# EAGLE board PCB-AC2SLb (EAGLE 6.5.0)
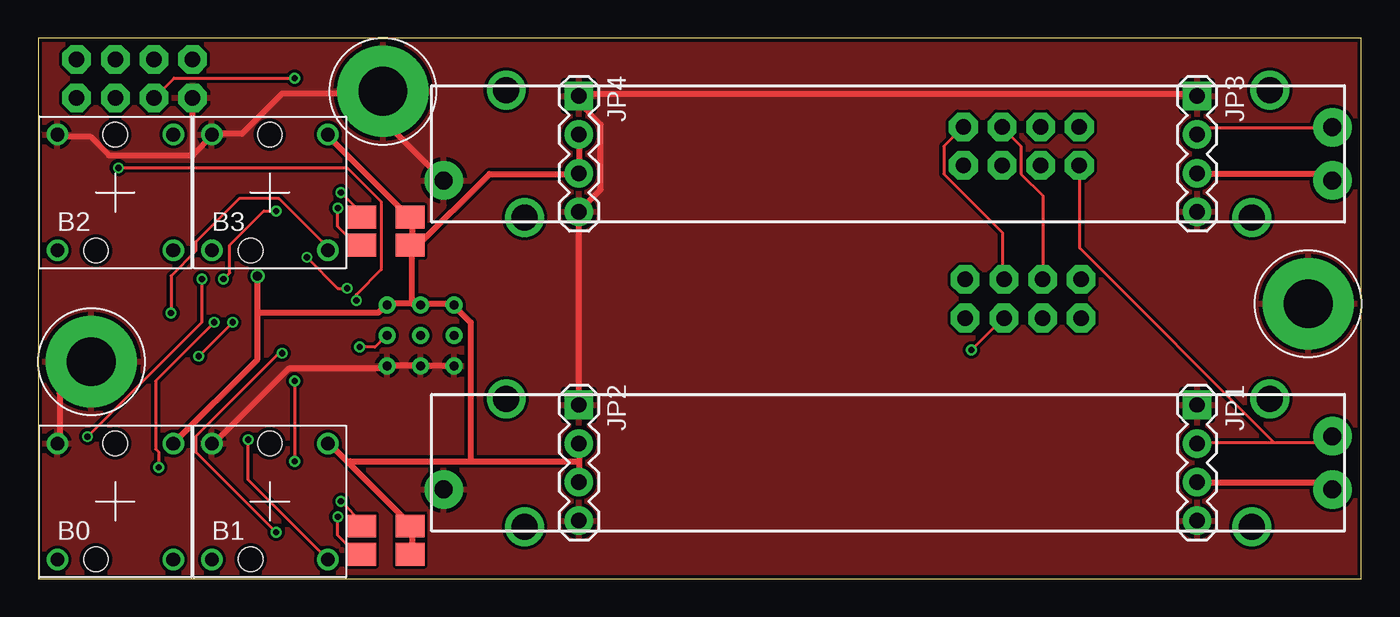
[diagram p0: board, top side]
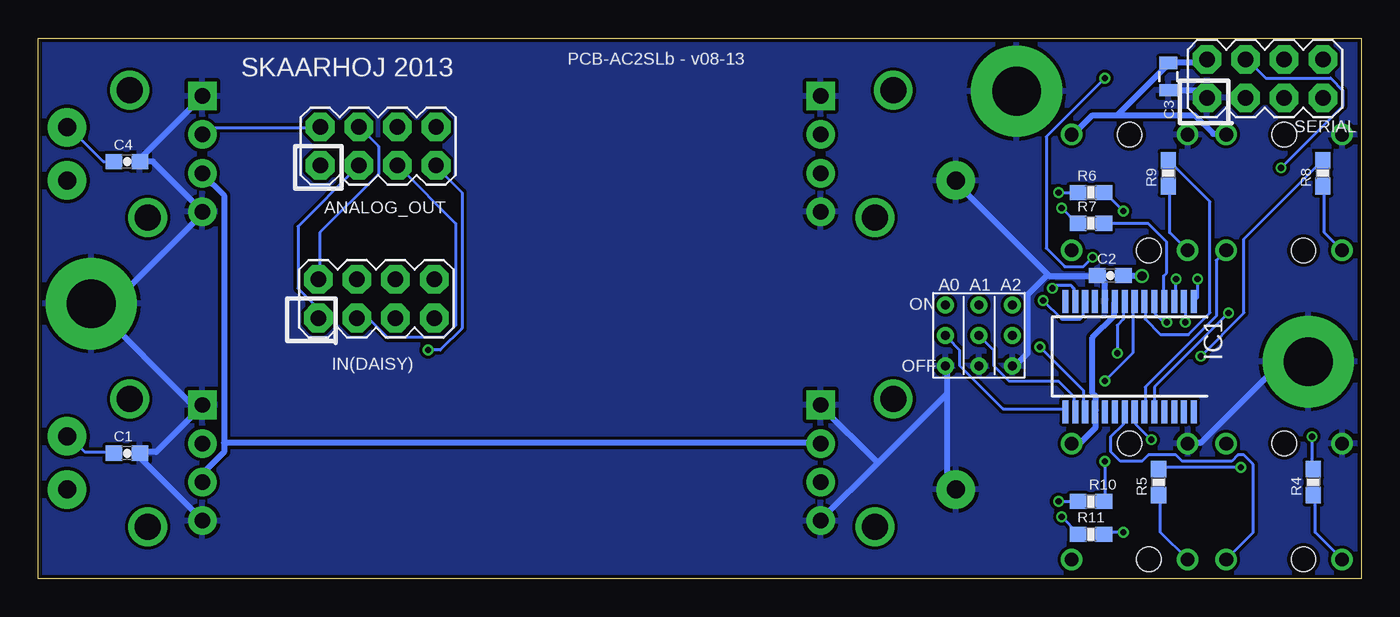
[diagram p1: board, bottom side, seen from below]

Size 87 x 35.56 mm. Coordinates in mm from the lower left corner, seen from the top.
Outline: 0,0 87,0 87,35.56 0,35.56 0,0
Copper layers (1*16): Top 0.035mm / dielectric 1.5mm / Bottom 0.035mm
Design rules "Fusion_eagle_rule_v1.1": minimum track width 6mil, minimum drill 12mil, track to track 6mil, track to pad 6mil, pad to pad 6mil, via to via 6mil, smd to smd 0mil, copper to edge 10mil, drill to drill 10mil, minimum pad ring 10mil, minimum via ring 6mil, stop-mask expansion 2mil, vias tented up to drill 100mil, thermal gap 10mil
Net classes: 0 default: width 0.203 mm, drill 0.406 mm, clearance 0.203 mm; 1 Power: width 0.406 mm, drill 0.61 mm, clearance 0.203 mm

## Footprints (pad centres in the part's own frame; a part is rotated, then mirrored left to right if it is on the bottom)
2X4 = drill 1.016 pad 1.88 octagon: 1 -3.81,-1.27; 2 -3.81,1.27; 3 -1.27,-1.27; 4 -1.27,1.27; 5 1.27,-1.27; 6 1.27,1.27; 7 3.81,-1.27; 8 3.81,1.27
CFPB-6/9MM = drill 0.9: P$1 -3.81,3.81; P$2 3.81,-3.81; P$3 3.81,3.81; P$4 -3.81,-3.81 | hole 1.6: 0,3.81; -1.27,-3.81
LEDBICOLOR-SMD = smd 1.9 x 1.5: P$1 1.6,0.925; P$2 -1.6,0.925; P$3 1.6,-0.925; P$4 -1.6,-0.925
0603-CAP = smd 1.1 x 1: 1 -0.85,0; 2 0.85,0
0805 = smd 0.8 x 1.2: 1 -0.9,0; 2 0.9,0
SSOP28 = smd 0.4 x 1.5: 1 -4.225,-3.625; 2 -3.575,-3.625; 3 -2.925,-3.625; 4 -2.275,-3.625; 5 -1.625,-3.625; 6 -0.975,-3.625; 7 -0.325,-3.625; 8 0.325,-3.625; 9 0.975,-3.625; 10 1.625,-3.625; 11 2.275,-3.625; 12 2.925,-3.625; 13 3.575,-3.625; 14 4.225,-3.625; 15 4.225,3.625; 16 3.575,3.625; 17 2.925,3.625; 18 2.275,3.625; 19 1.625,3.625; 20 0.975,3.625; 21 0.325,3.625; 22 -0.325,3.625; 23 -0.975,3.625; 24 -1.625,3.625; 25 -2.275,3.625; 26 -2.925,3.625; 27 -3.575,3.625; 28 -4.225,3.625
1X04 = drill 1.016 pad 1.88 square: 1 0,0 | drill 1.016 pad 1.88: 2 2.54,0; 3 5.08,0; 4 7.62,0
SLIDER45 = drill 1.194 pad 2.54: 1 -29.21,1.75; 2A -29.21,-1.75; 3 29.21,1.75 | drill 1.702: P$1 -23.9,4.2; P$2 23.9,4.2; P$3 25.1,-4.2; P$4 -25.1,-4.2
0603-RES = smd 1.1 x 1: 1 -0.85,0; 2 0.85,0
3.2MMPAD6MM = drill 3.2 pad 6: P$1 0,0
3BITADDR = drill 0.6: A0 -2.2,0; A1 0,0; A2 2.2,0; H1 -2.2,2; H2 0,2; H3 2.2,2; L1 -2.2,-2; L2 0,-2; L3 2.2,-2

## Placement (x,y rotation side)
ANALOG_OUT  M04X2  [2X4]  64.64,28.45 0 bottom
B0  CFPB  [CFPB-6/9MM]  5.08,5.08 0 top
B1  CFPB  [CFPB-6/9MM]  15.24,5.08 0 top
B2  CFPB  [CFPB-6/9MM]  5.08,25.4 0 top
B3  CFPB  [CFPB-6/9MM]  15.24,25.4 0 top
BILED1  LEDBICOLOR-SMD  [LEDBICOLOR-SMD]  22.86,2.54 0 top
BILED2  LEDBICOLOR-SMD  [LEDBICOLOR-SMD]  22.86,22.86 0 top
C1  10nF  [0603-CAP]  81.15,8.26 0 bottom
C2  100nF  [0603-CAP]  16.51,19.94 0 bottom
C3  10uF  [0805]  12.7,33.02 270 bottom
C4  10nF  [0603-CAP]  81.15,27.43 0 bottom
IC1  MCP23017SS  [SSOP28]  15.24,14.61 180 bottom
IN(DAISY)  M04X2  [2X4]  64.77,18.41 0 bottom
JP1  [1X04]  76.2,11.43 270 top
JP2  [1X04]  35.56,11.43 270 top
JP3  [1X04]  76.2,31.75 270 top
JP4  [1X04]  35.56,31.75 270 top
POT1  10K  [SLIDER45]  55.88,7.62 180 top
POT2  10K  [SLIDER45]  55.88,27.94 180 top
R4  47R  [0603-RES]  3.17,6.35 90 bottom
R5  47R  [0603-RES]  13.34,6.35 90 bottom
R6  820R  [0603-RES]  17.78,25.4 0 bottom
R7  150R  [0603-RES]  17.78,23.37 0 bottom
R8  47R  [0603-RES]  2.54,26.67 90 bottom
R9  47R  [0603-RES]  12.7,26.67 90 bottom
R10  820R  [0603-RES]  17.78,5.08 0 bottom
R11  150R  [0603-RES]  17.78,2.92 0 bottom
SERIAL  M04X2  [2X4]  6.35,32.89 0 bottom
U$1  GNDPAD6MM  [3.2MMPAD6MM]  22.68,32.06 0 top
U$15  GNDPAD6MM  [3.2MMPAD6MM]  3.5,14.28 0 top
U$19  3BITADDR  [3BITADDR]  25.15,16 0 bottom
U$21  GNDPAD6MM  [3.2MMPAD6MM]  83.5,18.09 0 top

## Library data of the parts
ANALOG_OUT C1-C4 IN(DAISY) JP1-JP4 R4-R11 SERIAL = SparkFun
B0 B1-B3 BILED1 BILED2 POT1 POT2 U$1 U$15 U$19 U$21 = SKAARHOJ
IC1 = microchip; MF: MICROCHIP; MPN: MCP23017-E/SS; OC_FARNELL: 1467674; OC_NEWARK: 31K2960

## Nets
5V [Power]: B0.P$3 B1.P$3 B2.P$3 B3.P$3 BILED1.P$1 BILED1.P$3 BILED2.P$1 BILED2.P$3 C2.2 C3.1 IC1.9 IC1.18 JP1.3 JP2.2 JP2.3 JP3.3 JP4.2 JP4.3 POT1.1 POT2.1 SERIAL.2 U$19.H1 U$19.H2 U$19.H3
A0: IC1.15 U$19.A0
A1: IC1.16 U$19.A1
A2: IC1.17 U$19.A2
ANALOG1: ANALOG_OUT.1 C1.1 JP1.2 POT1.2A
ANALOG2: ANALOG_OUT.2 C4.1 JP3.2 POT2.2A
GND [Power]: B0.P$1 B1.P$1 B2.P$1 B3.P$1 C1.2 C2.1 C3.2 C4.2 IC1.10 JP1.1 JP1.4 JP2.1 JP2.4 JP3.1 JP3.4 JP4.1 JP4.4 POT1.3 POT2.3 SERIAL.1 U$1.P$1 U$15.P$1 U$19.L1 U$19.L2 U$19.L3 U$21.P$1
GPA0: B0.P$2 IC1.21
GPA1: B1.P$2 IC1.22
GPA2: B2.P$2 IC1.23
GPA3: B3.P$2 IC1.24
I2C_SCL: IC1.12 SERIAL.4
I2C_SDA: IC1.13 SERIAL.3
L0: B0.P$4 R4.1
L1: B1.P$4 R5.1
L2: BILED2.P$2 R6.1
L3: BILED2.P$4 R7.1
L4: B2.P$4 R8.1
L5: B3.P$4 R9.1
L6: BILED1.P$2 R10.1
L7: BILED1.P$4 R11.1
N$2: IC1.4 R7.2
N$3: IC1.5 R8.2
N$4: IC1.6 R9.2
N$5: IC1.7 R10.2
N$6: IC1.8 R11.2
N$7: IC1.3 R6.2
N$8: IC1.2 R5.2
N$9: IC1.1 R4.2
N$10: ANALOG_OUT.3 IN(DAISY).1
N$11: ANALOG_OUT.5 IN(DAISY).3
N$12: ANALOG_OUT.7 IN(DAISY).5
N$13: ANALOG_OUT.4 IN(DAISY).2
N$14: ANALOG_OUT.6 IN(DAISY).4
N$15: ANALOG_OUT.8 IN(DAISY).6

## Tracks (layer width: path | path; a pad name or v marks a point on that pad's centre or on a via)
5V  (via drill 0.61)
  Top 0.406: JP1.3 76.2,6.3 84.53,6.3 84.94,5.89 POT1.1 | JP3.3 76.2,26.62 84.53,26.62 84.94,26.21 POT2.1 | JP2.2 35.56,7.72 | 35.56,7.72 JP2.3 | BILED1.P$3 24.59,1.63 24.59,3.45 BILED1.P$1 24.38,3.66 20.42,7.62 | 20.42,7.62 19.1,8.94 B1.P$3 | 28.45,7.72 20.52,7.72 20.42,7.62 | 28.45,7.72 35.56,7.72 | 14.43,17.48 14.43,14.43 B0.P$3 | 14.43,17.48 v14.43,19.91 | JP4.2 JP4.3 35.56,26.62 29.67,26.62 24.79,21.74 BILED2.P$3 | BILED2.P$3 24.59,21.95 24.59,23.77 BILED2.P$1 24.38,23.77 19.1,29.06 B3.P$3 | 24.59,18.09 24.99,18.09 U$19.H2 25.2,18.09 27.23,18.09 U$19.H1 27.43,17.88 28.45,16.87 28.45,7.72 | 24.59,18.09 22.96,18.09 U$19.H3 22.76,17.88 22.35,17.48 14.43,17.48 | 24.59,18.09 24.59,21.74 BILED2.P$3
  Bottom 0.406: JP1.3 76.2,6.91 74.78,8.33 74.78,8.94 | 74.78,8.94 74.78,25.2 76.2,26.62 JP3.3 | IC1.9 16.26,18.09 16.26,17.27 17.68,15.85 17.68,12.19 17.48,11.99 17.48,11.18 IC1.18 17.48,10.77 17.48,9.96 18.49,8.94 18.9,8.94 B1.P$3 | SERIAL.2 10.16,34.14 10.36,33.93 12.6,33.93 C3.1 12.8,33.73 16.05,30.48 | 16.05,30.48 17.68,30.48 18.9,29.26 B3.P$3 | 16.05,30.48 10.97,30.48 9.75,29.26 8.94,29.26 B2.P$3 | v14.43,19.91 15.65,19.91 C2.2 | 74.78,8.94 35.56,8.94 JP2.2
A0
  Bottom 0.203: IC1.15 19.51,11.18 23.57,11.18 26.42,14.02 26.42,15.04 27.23,15.85 U$19.A0
A1
  Bottom 0.203: U$19.A1 24.18,15.04 24.18,14.02 23.16,13.01 19.91,13.01 18.9,11.99 18.9,11.18 IC1.16
A2  (via drill 0.41)
  Top 0.203: v21.13,15.24 22.15,15.24 22.76,15.85 U$19.A2
  Bottom 0.203: v21.13,15.24 18.29,12.39 18.29,11.18 IC1.17
ANALOG1
  Top 0.203: 81.28,8.94 84.53,8.94 84.94,9.35 POT1.2A | 81.28,8.94 76.2,8.94 JP1.2 | 81.28,8.94 68.48,21.74 68.48,27.03 ANALOG_OUT.1
  Bottom 0.203: C1.1 82.09,8.33 83.92,8.33 84.94,9.35 POT1.2A
ANALOG2
  Top 0.203: POT2.2A 84.94,29.67 76.61,29.67 76.2,29.26 JP3.2
  Bottom 0.203: C4.1 82.7,27.43 84.94,29.67 POT2.2A | ANALOG_OUT.2 68.48,29.67 75.79,29.67 76.2,29.26 JP3.2
GND
  Top 0.406: 10.26,27.94 11.38,29.06 B3.P$1 11.58,29.26 13.41,29.26 16.05,31.9 20.93,31.9 | 10.26,27.94 10.16,27.84 4.67,27.84 3.45,29.06 1.42,29.06 B2.P$1 | SERIAL.1 10.16,28.04 10.26,27.94 | 20.93,31.9 22.55,31.9 U$1.P$1 20.93,31.9 | 20.93,31.9 26.62,26.21 POT2.3 | B0.P$1 1.42,8.94 1.42,12.19 3.45,14.22 U$15.P$1 | U$19.L1 27.23,14.02 25.2,14.02 U$19.L2 24.99,14.02 22.96,14.02 U$19.L3 22.76,13.82 16.46,13.82 11.58,8.94 B1.P$1 | JP2.1 JP4.4 35.56,24.18 36.98,25.6 36.98,29.87 35.56,31.29 JP4.1 35.56,31.9 76.2,31.9 JP3.1
  Bottom 0.406: IC1.10 16.87,18.29 16.87,19.51 17.27,19.91 C2.1 17.48,19.91 20.52,19.91 20.62,20.02 | 20.62,20.02 26.62,26.01 POT2.3 | C3.2 12.6,32.11 10.57,32.11 10.16,31.7 SERIAL.1 | JP3.1 76.2,31.7 80.47,27.43 C4.2 79.45,27.43 76.2,24.18 JP3.4 76.2,23.98 82.7,17.48 U$21.P$1 83.52,18.09 76.61,11.18 JP1.1 76.2,11.38 79.25,8.33 80.26,8.33 C1.2 80.47,8.13 76.2,3.86 JP1.4 | B1.P$1 11.38,8.94 10.57,8.94 5.28,14.22 3.66,14.22 U$15.P$1 | 27.23,12.19 27.23,6.3 26.82,5.89 POT1.3 | 27.23,12.19 27.23,13.82 U$19.L1 | 27.23,12.19 31.8,7.62 | 31.8,7.62 35.56,3.86 JP2.4 | 31.8,7.62 35.56,11.38 JP2.1 | 20.62,20.02 21.95,18.69 21.95,14.83 22.76,14.02 U$19.L3
  pour Top: 0,0 87.63,0 87.63,35.56 0,35.56
  pour Bottom: 0,0 87.63,0 87.63,35.56 0,35.56
GPA0
  Bottom 0.203: B0.P$2 7.11,3.05 7.11,7.52 7.72,8.13 8.13,8.13 8.53,7.72 11.79,7.72 12.19,8.13 14.02,8.13 14.43,7.72 15.85,7.72 16.46,8.33 16.46,9.35 15.65,10.16 15.65,10.97 IC1.21
GPA1  (via drill 0.41)
  Top 0.203: v13.82,9.14 13.82,6.5 B1.P$2
  Bottom 0.203: v13.82,9.14 14.83,10.16 14.83,10.97 IC1.22
GPA2
  Bottom 0.203: B2.P$2 9.55,20.93 9.55,17.27 14.22,12.6 14.22,11.18 IC1.23
GPA3  (via drill 0.41)
  Top 0.203: v8.74,17.48 8.74,19.91 10.36,21.54 10.36,22.15 13.21,24.99 15.85,24.99 19.1,21.74 B3.P$2
  Bottom 0.203: v8.74,17.48 13.61,12.6 13.61,11.18 IC1.24
I2C_SCL  (via drill 0.41)
  Top 0.203: v20.93,18.29 20.93,18.69 22.55,20.32 22.55,24.79 20.32,27.03 v5.28,27.03
  Bottom 0.203: v20.93,18.29 19.71,17.07 18.49,17.07 18.29,17.27 18.29,18.09 IC1.12 | v5.28,27.03 1.22,31.09 1.22,32.11 2.03,32.92 6.3,32.92 7.52,34.14 SERIAL.4
I2C_SDA  (via drill 0.41)
  Top 0.203: v20.32,19.1 19.71,19.1 v17.68,21.13 | v16.87,32.92 8.94,32.92 7.72,31.7 SERIAL.3
  Bottom 0.203: v20.32,19.1 20.12,19.3 19.1,19.3 18.9,19.1 18.9,18.29 IC1.13 | v17.68,21.13 18.29,20.52 19.51,20.52 20.73,21.74 20.73,29.06 v16.87,32.92
L0
  Bottom 0.203: B0.P$4 3.05,3.05 3.05,5.49 R4.1
L1
  Bottom 0.203: B1.P$4 13.21,3.05 13.21,5.49 R5.1
L2  (via drill 0.41)
  Top 0.203: v19.91,25.4 21.34,23.98 BILED2.P$2
  Bottom 0.203: v19.91,25.4 R6.1
L3  (via drill 0.41)
  Top 0.203: v19.71,24.38 19.71,23.16 21.13,21.74 BILED2.P$4
  Bottom 0.203: v19.71,24.38 18.69,23.37 R7.1
L4
  Bottom 0.203: B2.P$4 2.44,22.76 2.44,25.81 R8.1
L5
  Bottom 0.203: B3.P$4 12.6,22.76 12.6,25.81 R9.1
L6  (via drill 0.41)
  Top 0.203: v19.91,5.08 21.34,3.66 BILED1.P$2
  Bottom 0.203: v19.91,5.08 R10.1
L7  (via drill 0.41)
  Top 0.203: v19.71,4.06 19.71,2.85 21.13,1.42 BILED1.P$4
  Bottom 0.203: v19.71,4.06 18.69,3.05 R11.1
N$2
  Bottom 0.203: R7.2 14.02,23.37 12.8,22.15 12.8,20.12 13.01,19.91 13.01,18.29 IC1.4
N$3  (via drill 0.41)
  Top 0.203: v12.8,16.87 v10.57,14.63
  Bottom 0.203: v10.57,14.63 7.72,17.48 7.72,22.35 2.64,27.43 R8.2 | v12.8,16.87 13.01,16.87 13.61,17.48 13.61,18.09 IC1.5
N$4
  Bottom 0.203: R9.2 12.6,27.43 9.96,24.79 9.96,17.48 11.38,16.05 13.21,16.05 14.22,17.07 14.22,18.09 IC1.6
N$5  (via drill 0.41)
  Top 0.203: v16.87,13.01 v16.87,7.72
  Bottom 0.203: v16.87,7.72 16.87,5.08 R10.2 | v16.87,13.01 15.04,14.83 15.04,18.09 IC1.7
N$6  (via drill 0.41)
  Top 0.203: v15.65,3.05 10.36,8.33 10.36,9.35 15.85,14.83 v16.05,14.83
  Bottom 0.203: v15.65,3.05 16.87,3.05 R11.2 | v16.05,14.83 16.05,16.66 15.65,17.07 15.65,18.09 IC1.8
N$7  (via drill 0.41)
  Top 0.203: v15.65,24.18 14.83,24.18 12.6,21.95 12.6,20.12 v12.19,19.71
  Bottom 0.203: v15.65,24.18 16.87,25.4 R6.2 | v12.19,19.71 12.19,18.29 IC1.3
N$8  (via drill 0.41)
  Top 0.203: v7.92,7.32 7.92,8.33 7.72,8.53 7.72,13.01 v11.58,16.87
  Bottom 0.203: v7.92,7.32 13.21,7.32 R5.2 | v11.58,16.87 11.58,18.09 IC1.2
N$9  (via drill 0.41)
  Top 0.203: v3.25,9.35 10.77,16.87 v10.77,19.71
  Bottom 0.203: v3.25,9.35 3.25,7.32 R4.2 | v10.77,19.71 10.77,18.49 10.97,18.29 IC1.1
N$10
  Bottom 0.203: IN(DAISY).1 68.68,17.27 68.68,17.88 69.9,19.1 69.9,23.16 66.04,27.03 ANALOG_OUT.3
N$11
  Bottom 0.203: IN(DAISY).3 66.04,17.07 65.23,17.07 64.01,15.85 60.35,15.85 59.54,16.66 59.54,23.37 63.2,27.03 ANALOG_OUT.5
N$12  (via drill 0.41)
  Top 0.203: v61.37,15.04 63.4,17.07 IN(DAISY).5
  Bottom 0.203: v61.37,15.04 60.55,15.04 59.13,16.46 59.13,25.4 60.76,27.03 ANALOG_OUT.7
N$13
  Bottom 0.203: IN(DAISY).2 68.48,19.71 68.48,22.76 64.62,26.62 64.62,28.45 65.84,29.67 ANALOG_OUT.4
N$14
  Top 0.203: IN(DAISY).4 66.04,25.2 64.62,26.62 64.62,28.45 63.4,29.67 ANALOG_OUT.6
N$15
  Top 0.203: IN(DAISY).6 63.4,19.71 63.4,22.76 59.54,26.62 59.54,28.45 60.76,29.67 ANALOG_OUT.8

## Text on the board
_bsilk: PCB-AC2SLb - v08-13 | SKAARHOJ 2013